# Altium PCB PCB.PcbDoc
Units mil, origin at the board's own origin, x right, y up, seen from the top; angles counter-clockwise.
Board outline 6000 x 4000 mil, 2 copper layers (Top Layer, Bottom Layer); 6 components, 8 nets, 36 pads, 0 vias.
Unrouted connection lines stored in the file: 13.
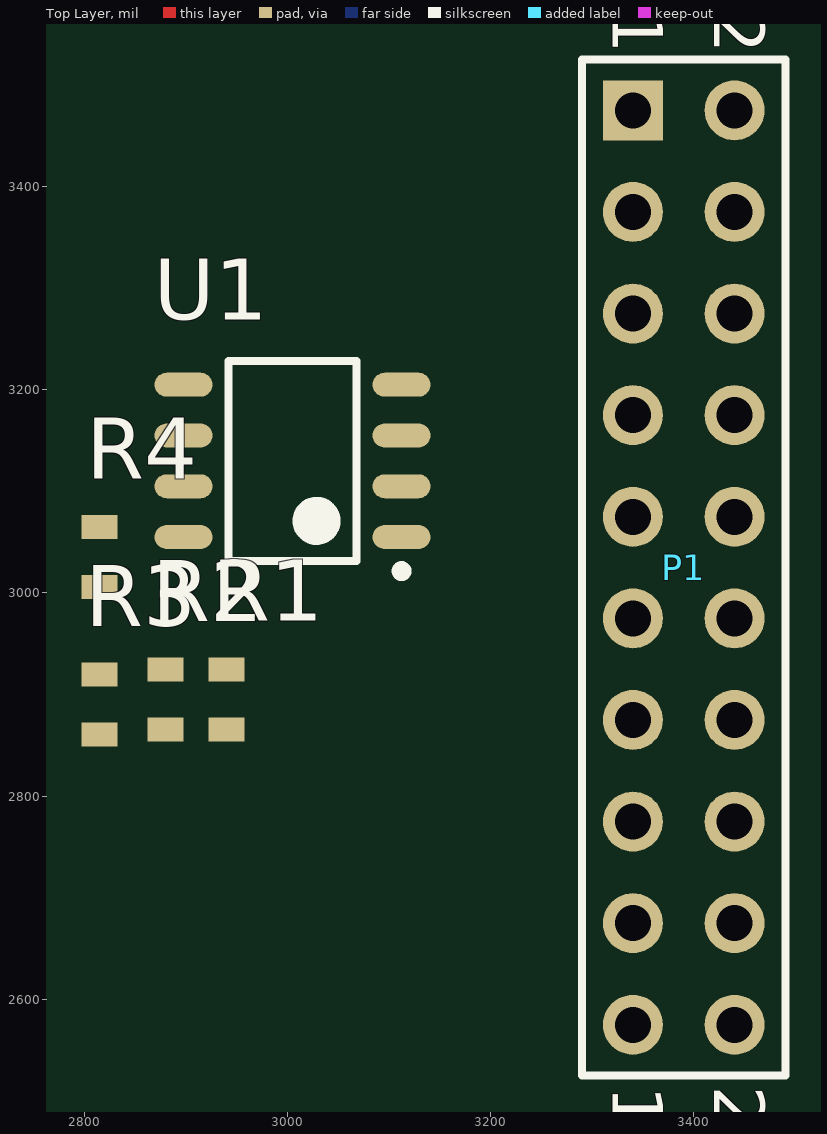
[diagram p0: Top Layer view]
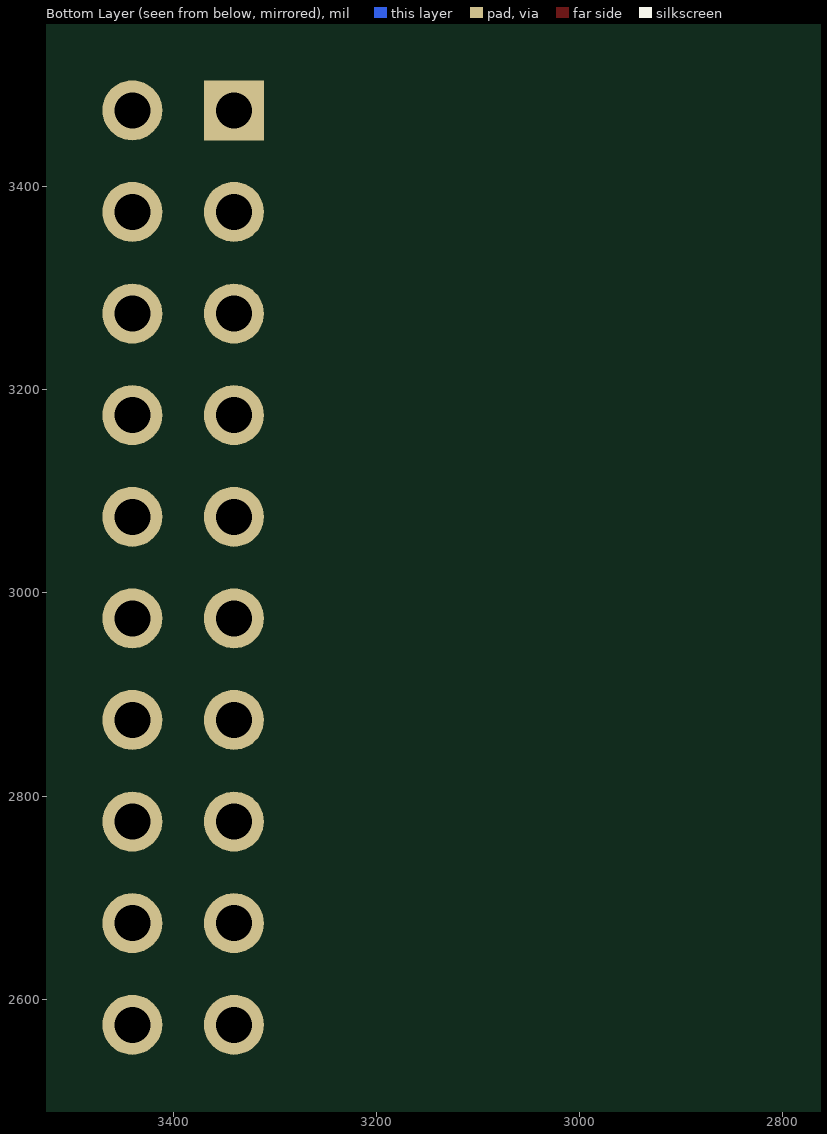
[diagram p1: Bottom Layer view, seen from below]

## Layer stack, top to bottom
Top Solder: solder mask 0.4, Solder Resist, Dk 3.5
Top Layer: signal copper 1.4
Dielectric 1: dielectric 12.6, FR-4, Dk 4.8
Bottom Layer: signal copper 1.4
Bottom Solder: solder mask 0.4, Solder Resist, Dk 3.5

## Board outline
1000,1000 7000,1000 7000,5000 1000,5000

## Design rules (kind name [scope] priority, off if disabled: settings)
Clearance [All] p1: gap=10 ignorepadtopadclearanceinfootprint=FALSE except(0: Arc-Hole Track-Hole SMDPad-Hole THPad-Hole Via-Hole Fill-Hole Poly-Hole Region-Hole Text-Hole)
DiffPairsRouting [All] p1: maxlimit=10 minlimit=10 mostfreqgap=10 toplayer_minwidth=15 toplayer_maxwidth=15 toplayer_prefwidth=15 bottomlayer_minwidth=15 bottomlayer_maxwidth=15 bottomlayer_prefwidth=15 maxuncoupledlength=500
PolygonConnect [All] p1: connectstyle=Relief reliefconductorwidth=10 reliefentries=4 polygonreliefangle="90 Angle" airgapwidth=10
RoomDefinition Schematics [InComponentClass('Schematics')] p1: confinementstyle=ConfineIn formatcopy=TRUE lockcomponents=FALSE outline 2730,2355 3955,2355 3955,3630 2730,3630
RoutingVias [All] p1: holewidth=28 width=50 viastyle="Through Hole" minholewidth=28 minwidth=50 maxholewidth=28 maxwidth=50
SolderMaskExpansion [All] p1: expansion=4 istentingtop=FALSE
Width [All] p1: maxlimit=10 minlimit=10 preferedwidth=10
29 further rules are at their usual default settings.

## Classes and differential pairs
net class "DIFF PAIR DATA": D_N D_P
differential pair D: +D_P -D_N

## Components (designator, comment, footprint, x,y, rotation, side; value= is the part's Value field where it differs from the comment)
P1 "Header 10X2" HDR2X10 3340,3475 r270 top
R1 "CPF-A-0603B100KE1" R0603 2940,2895 r90 top value=100K
R2 "CPF-A-0603B100KE1" R0603 2880,2895 r270 top value=60R
R3 "CPF-A-0603B100KE1" R0603 2815,2890 r90 top value=60R
R4 "CPF-A-0603B100KE1" R0603 2815,3035.47 r270 top value=100K
U1 "RS485 tranciever" ST485CDR 3005,3130 r180 top

## Footprints (in the part's own frame and the unit in brackets; to place one, negate y for a bottom-side part, rotate by r counter-clockwise, add the part's x,y. Pads: shape width x height; smd on the part's side, far side on the other; paste and mask are expansions set on the pad)
HDR2X10 [mm] "Connector; Header; 10x2 Position"
  rect 1.5x1.5 hole 0.9: 1(0,0)
  round 1.5 hole 0.9: 2(0,2.54) 3(2.54,0) 4(2.54,2.54) 5(5.08,0) 6(5.08,2.54) 7(7.62,0) 8(7.62,2.54) 9(10.16,0) 10(10.16,2.54) 11(12.7,0) 12(12.7,2.54) 13(15.24,0) 14(15.24,2.54) 15(17.78,0) 16(17.78,2.54) 17(20.32,0) 18(20.32,2.54) 19(22.86,0) 20(22.86,2.54)
  silkscreen extent -1.27,-1.27 24.13,3.81
R0603 [mm]
  rect 0.6x0.9 smd: 1(-0.75,0) 2(0.75,0)
  body extent -0.8,-0.45 0.8,0.45, height 0.5
ST485CDR [mm] "SOIC, 8-Leads, Body 4.90x3.90mm, Pitch 1.27mm, IPC Medium Density"
  oval 1.45x0.6 smd: 1(-2.725,1.905) 2(-2.725,0.635) 3(-2.725,-0.635) 4(-2.725,-1.905) 5(2.725,-1.905) 6(2.725,-0.635) 7(2.725,0.635) 8(2.725,1.905)
  silkscreen extent -2.85,-2.5 1.6,2.88, body extent -3,-2.5 3,2.5, height 1.75

## Part data
P1: "Header, 10-Pin, Dual row", LatestRevisionDate=17-Jul-2002, LatestRevisionNote="Re-released for DXP Platform.", Publisher="Altium Limited"
R1 R2 R3 R4: "R0603"
U1: library part ST485CDR, "RS485 tranciever single", Supplier Part Number 1=1564307, Supplier 1=Farnell

## Nets (pads, with @x,y where several pads share a name; then routed paths per layer and width w, separated by ;. In a path a pad name is that pad's centre, name@x,y a point inside that pad or via, vN(x,y) a via of type N, cw(c..) or ccw(c..) an arc to the next point about the centre after c; other vN are vias at no path point)
+5V: P1.2 R1.2 U1.8
D_N: R3.2 R4.2 U1.7
D_P: R1.1 R2.2 U1.6
GND: P1.6 R4.1 U1.5
NetP1_8: P1.8 U1.4
NetP1_10: P1.10 U1.1
NetP1_12: P1.12 U1.2 U1.3
NetR2_1: R2.1 R3.1
pads on no net: P1.1 P1.3 P1.4 P1.5 P1.7 P1.9 P1.11 P1.13 P1.14 P1.15 P1.16 P1.17 P1.18 P1.19 P1.20

## Text inside footprints (layer, text, board x,y; h text height)
P1: Top Overlay "20" at 3420,2515 h50 r270; Top Overlay "19" at 3320,2515 h50 r270; Top Overlay "1" at 3320,3575 h50 r270; Top Overlay "2" at 3420,3575 h50 r270